# Altium PCB PCB_MAIN_FET.PcbDoc
Units mil, origin at the board's own origin, x right, y up, seen from the top; angles counter-clockwise.
Board outline 6000 x 4000 mil, 2 copper layers (Top Layer, Bottom Layer); 157 components, 92 nets, 451 pads, 0 vias.
Unrouted connection lines stored in the file: 311.
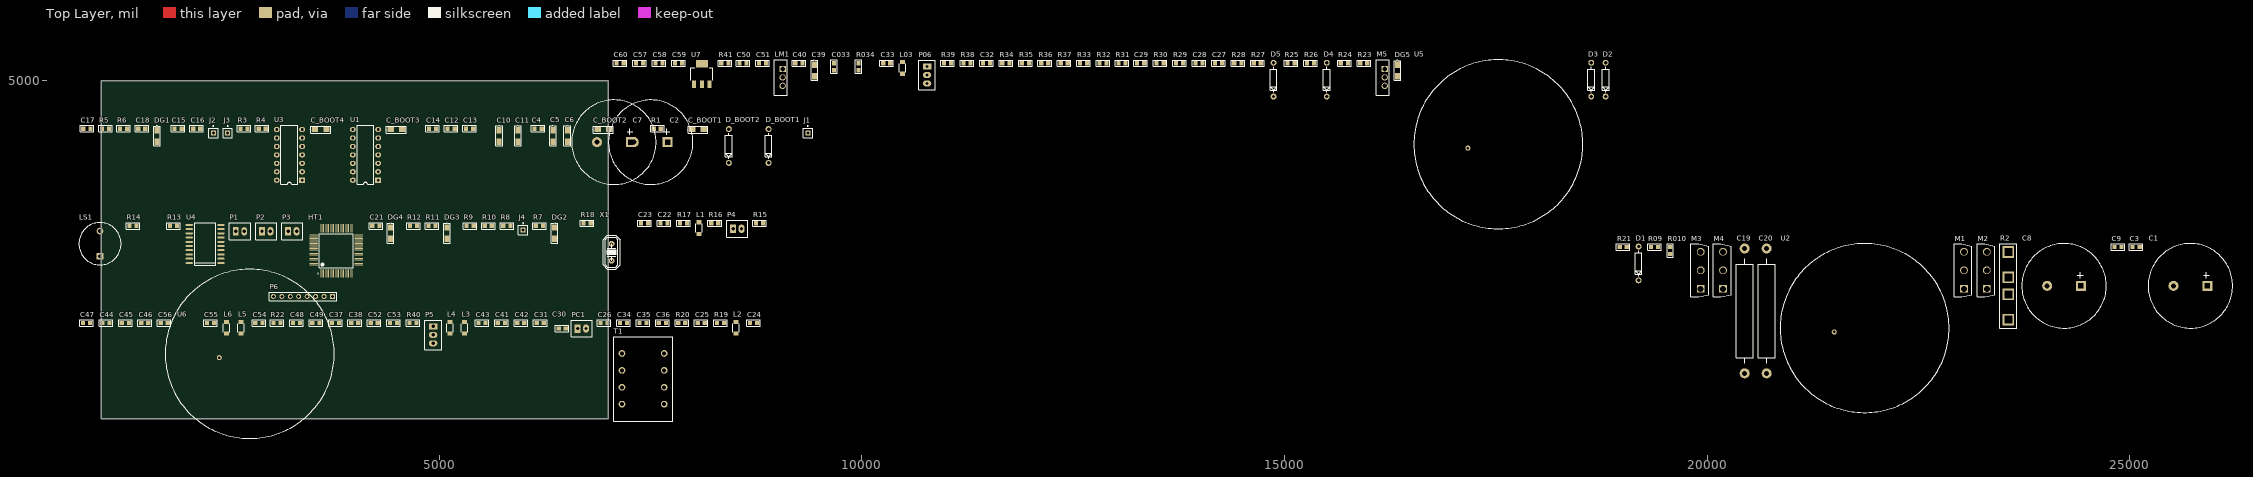
[diagram p0: Top Layer view]
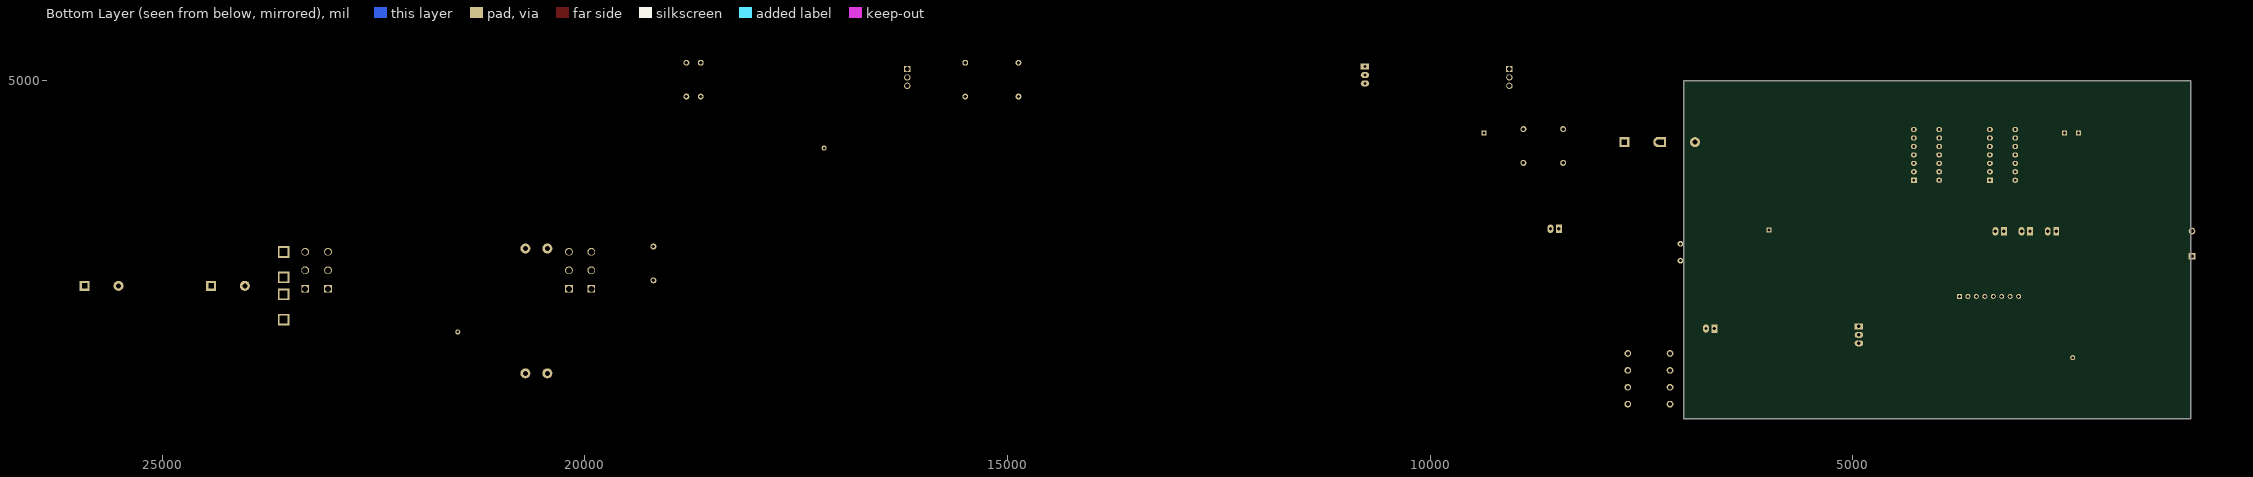
[diagram p1: Bottom Layer view, seen from below]

## Layer stack, top to bottom
Top Layer: signal copper 1.4
Dielectric: dielectric 12.6, FR-4, Dk 4.8
Bottom Layer: signal copper 1.4

## Board outline
1000,1000 7000,1000 7000,5000 1000,5000

## Design rules (kind name [scope] priority, off if disabled: settings)
Clearance [All] p1: gap=10
PolygonConnect [All] p1: connectstyle=Relief reliefconductorwidth=10 reliefentries=4 polygonreliefangle="90 Angle"
RoomDefinition overview [InComponentClass('overview')] p1: confinementstyle=ConfineIn formatcopy=TRUE lockcomponents=FALSE outline 7045,965 7770,965 7770,2085 7045,2085
RoutingVias [All] p1: holewidth=28 width=50 viastyle="Through Hole" minholewidth=28 minwidth=50 maxholewidth=28 maxwidth=50
SilkscreenOverComponentPads [All] p1: minsilkscreentomaskgap=10
SolderMaskExpansion [All] p1: expansion=4
Width [All] p1: maxlimit=10 minlimit=10 preferedwidth=10
27 further rules are at their usual default settings.

## Components (designator, comment, footprint, x,y, rotation, side; value= is the part's Value field where it differs from the comment)
C1 "3300uF-100V" 3300uF 25520,2575 r0 top
C2 "3300uF-100V" 3300uF 7300,4275 r0 top
C3 "CX4" C0805 24580,2875 r0 top
C4 "cap SMD" C0805 5670,4275 r0 top
C5 "10uF" CAP_10uF_SMD 5930,4210 r0 top
C6 "10uF" CAP_10uF_SMD 6100,4210 r0 top
C7 "3300uF-100V" 3300uF 6865,4275 r0 top
C8 "3300uF-100V" 3300uF 24025,2575 r0 top
C9 "cap SMD" C0805 24365,2875 r0 top
C10 "10uF" CAP_10uF_SMD 5295,4210 r0 top
C11 "10uF" CAP_10uF_SMD 5515,4210 r0 top
C12 "cap SMD" C0805 4640,4275 r0 top
C13 "cap SMD" C0805 4860,4275 r0 top
C14 "CX4" C0805 4420,4275 r0 top
C15 "CX4" C0805 1410,4275 r0 top
C16 "CX4" C0805 1630,4275 r0 top
C17 "CAP SMD1206" C0805 330,4275 r0 top
C18 "CAP SMD1206" C0805 980,4275 r0 top
C19 "polypropylen" 2.2UF-1000V 20445,1540 r90 top
C20 "polypropylen" 2.2UF-1000V 20705,1540 r90 top
C21 "cap SMD" C0805 3750,3125 r0 top
C22 "CX4" C0805 7160,3155 r0 top
C23 "CAP SMD1206" C0805 6930,3155 r0 top
C24 "CX4" C0805 8220,1975 r0 top
C25 "CX4" C0805 7600,1975 r0 top
C26 "CX4" C0805 6450,1975 r0 top
C27 "CX4" C0805 13720,5050 r0 top
C28 "CX4" C0805 13490,5050 r0 top
C29 "CX4" C0805 12800,5050 r0 top
C30 "CX4" C0805 5955,1910 r0 top
C31 "CX4" C0805 5695,1975 r0 top
C32 "CX4" C0805 10975,5050 r0 top
C33 "CX4" C0805 9795,5050 r0 top
C033 "CX4" C0805 9830,4670 r90 top
C34 "CX4" C0805 6680,1975 r0 top
C35 "CX4" C0805 6910,1975 r0 top
C36 "CX4" C0805 7140,1975 r0 top
C37 "CX4" C0805 3270,1975 r0 top
C38 "CAP SMD1206" C0805 3500,1975 r0 top
C39 "10uF" CAP_10uF_SMD 9025,4985 r0 top
C40 "CX4" C0805 8755,5050 r0 top
C41 "CX4" C0805 5235,1975 r0 top
C42 "CX4" C0805 5465,1975 r0 top
C43 "CX4" C0805 5005,1975 r0 top
C44 "CX4" C0805 555,1975 r0 top
C45 "CAP SMD1206" C0805 785,1975 r0 top
C46 "CAP SMD1206" C0805 1015,1975 r0 top
C47 "CX4" C0805 325,1975 r0 top
C48 "CX3" C0805 2810,1975 r0 top
C49 "CX4" C0805 3040,1975 r0 top
C50 "CX3" C0805 8095,5050 r0 top
C51 "CX4" C0805 8325,5050 r0 top
C52 "CX3" C0805 3730,1975 r0 top
C53 "CX4" C0805 3960,1975 r0 top
C54 "CX4" C0805 2365,1975 r0 top
C55 "CX4" C0805 1795,1975 r0 top
C56 "CX4" C0805 1245,1975 r0 top
C57 "CAP SMD1206" C0805 6870,5050 r0 top
C58 "CAP SMD1206" C0805 7100,5050 r0 top
C59 "CAP SMD1206" C0805 7330,5050 r0 top
C60 "CX4" C0805 6640,5050 r0 top
C_BOOT1 "10u" CAP_10uF_SMD 8200,4010 r90 top
C_BOOT2 "10uF" CAP_10uF_SMD 7080,4010 r90 top
C_BOOT3 "10uF" CAP_10uF_SMD 4630,4010 r90 top
C_BOOT4 "10u" CAP_10uF_SMD 3735,4010 r90 top
D1 "FR107" DIODE5819_V1 18775,2770 r0 top
D2 "FR107" DIODE5819_V1 18385,4945 r0 top
D3 "1N5819" DIODE5819_V1 18215,4945 r0 top
D4 "1N5819" DIODE5819_V1 15085,4945 r0 top
D5 "1N5819" DIODE5819_V1 14455,4945 r0 top
D_BOOT1 "UF4007" DIODE5819_V1 8480,4160 r0 top
D_BOOT2 "UF4007" DIODE5819_V1 8010,4160 r0 top
DG1 "4148" 4148_SMD 1870,3940 r90 top
DG2 "4148" 4148_SMD 6575,2790 r90 top
DG3 "4148" 4148_SMD 5305,2790 r90 top
DG4 "4148" 4148_SMD 4635,2790 r90 top
DG5 "4148" 4148_SMD 16550,4715 r90 top
HT1 "LPC175x" "PCBComponent_1 - duplicate" 3710,4255 r0 top
J1 "Socket" PIN1 9360,4385 r0 top
J2 "J1" PIN1 2325,4385 r0 top
J3 "J1" PIN1 2495,4385 r0 top
J4 "J1" PIN1 5990,3235 r0 top
L1 "Inductor" L_1uH 8240,2735 r90 top
L2 "Inductor" L_1uH 8680,1555 r90 top
L03 "Inductor" L_1uH 10650,4630 r90 top
L3 "Inductor" L_1uH 5465,1555 r90 top
L4 "Inductor" L_1uH 5295,1555 r90 top
L5 "Inductor" L_1uH 2820,1555 r90 top
L6 "Inductor" L_1uH 2650,1555 r90 top
LM1 "7812" TO220AB 8650,4865 r0 top
LS1 "SPEAKER" BUZZ 480,2905 r0 top
M1 "IRFP4468PBF-ND" TO247AB 23040,2540 r90 top
M2 "IRFP4468PBF-ND" TO247AB 23310,2540 r90 top
M3 "IRFP4468PBF-ND" TO247AB 19925,2540 r90 top
M4 "IRFP4468PBF-ND" TO247AB 20190,2540 r90 top
M5 "IRF640" TO220AB 15775,4865 r0 top
P1 "Header 2" CONECTOR_2PIN 2230,3285 r0 top
P2 "Header 2" CONECTOR_2PIN 2540,3285 r0 top
P3 "Header 2" CONECTOR_2PIN 2850,3285 r0 top
P4 "Header 2" CONECTOR_2PIN 8115,3315 r0 top
P5 "Header 3" CONECTOR_3PIN 4575,1935 r0 top
P06 "LM35 -Temperature Sensors" CONECTOR_3PIN 10420,5010 r0 top
P6 "Header 8" HDR1X8 3735,2450 r180 top
PC1 "JUMPER" CONECTOR_2PIN 6275,2135 r0 top
R1 "Resistor SMD0805" R0805 7150,4215 r0 top
R2 "Shun" RES_SHUN 23565,2175 r90 top
R3 "Resistor SMD0805" R0805 2260,4215 r0 top
R4 "Resistor SMD0805" R0805 2475,4215 r0 top
R5 "Resistor SMD0805" R0805 620,4215 r0 top
R6 "Resistor SMD0805" R0805 835,4215 r0 top
R7 "Resistor SMD0805" R0805 5755,3065 r0 top
R8 "Resistor SMD0805" R0805 5370,3065 r0 top
R09 "Resistor SMD0805" R0805 18950,2815 r0 top
R9 "Resistor SMD0805" R0805 4935,3065 r0 top
R010 "Resistor SMD0805" R0805 19785,2565 r90 top
R10 "Resistor SMD0805" R0805 5150,3065 r0 top
R11 "Resistor SMD0805" R0805 4485,3065 r0 top
R12 "Resistor SMD0805" R0805 4265,3065 r0 top
R13 "Resistor SMD0805" R0805 1425,3065 r0 top
R14 "Resistor SMD0805" R0805 945,3065 r0 top
R15 "Resistor SMD0805" R0805 8360,3095 r0 top
R16 "Resistor SMD0805" R0805 7830,3095 r0 top
R17 "Resistor SMD0805" R0805 7460,3095 r0 top
R18 "Resistor SMD0805" R0805 6320,3095 r0 top
R19 "Resistor SMD0805" R0805 7900,1915 r0 top
R20 "Resistor SMD0805" R0805 7440,1915 r0 top
R21 "Resistor SMD0805" R0805 18580,2815 r0 top
R22 "Resistor SMD0805" R0805 2650,1915 r0 top
R23 "Resistor SMD0805" R0805 15510,4990 r0 top
R24 "Resistor SMD0805" R0805 15280,4990 r0 top
R25 "Resistor SMD0805" R0805 14650,4990 r0 top
R26 "Resistor SMD0805" R0805 14880,4990 r0 top
R27 "Resistor SMD0805" R0805 14250,4990 r0 top
R28 "Resistor SMD0805" R0805 14020,4990 r0 top
R29 "Resistor SMD0805" R0805 13330,4990 r0 top
R30 "Resistor SMD0805" R0805 13100,4990 r0 top
R31 "Resistor SMD0805" R0805 12650,4990 r0 top
R32 "Resistor SMD0805" R0805 12425,4990 r0 top
R33 "Resistor SMD0805" R0805 12195,4990 r0 top
R34 "Resistor SMD0805" R0805 11275,4990 r0 top
R034 "Resistor SMD0805" R0805 10180,4740 r90 top
R35 "Resistor SMD0805" R0805 11505,4990 r0 top
R36 "Resistor SMD0805" R0805 11735,4990 r0 top
R37 "Resistor SMD0805" R0805 11965,4990 r0 top
R38 "Resistor SMD0805" R0805 10815,4990 r0 top
R39 "Resistor SMD0805" R0805 10585,4990 r0 top
R40 "120" R0805 4260,1915 r0 top
R41 "Resistor SMD0805" R0805 7950,4990 r0 top
T1 "EE25" TRANSFORMER 7660,1175 r90 top
U1 "IR2110" 74HC14 4240,3485 r90 top
U2 "LM358" PCBComponent_1 20740,2065 r0 top
U3 "IR2110" 74HC14 3340,3485 r90 top
U4 "74HCT245" 74HCT245D_STO163 1945,3020 r0 top
U5 "KA3842" PCBComponent_1 16405,4240 r0 top
U6 "SN75176A" PCBComponent_1 1630,1760 r0 top
U7 "LM1117S33" LM1117 7710,4835 r0 top
X1 "12MHZ" CRYSTAL_12Mhz 7190,2550 r90 top

## Footprints (in the part's own frame and the unit in brackets; to place one, negate y for a bottom-side part, rotate by r counter-clockwise, add the part's x,y. Pads: shape width x height; smd on the part's side, far side on the other; paste and mask are expansions set on the pad)
2.2UF-1000V [mm]
  round 3 hole 1.5: 1(0,0) 2(37.5,0)
  silkscreen extent 3,-2.54 34.5,2.54
74HC14 [mil]
  rect 60x70 hole 32: 1(340,-35)
  oval 60x70 hole 32: 2(440,-35) 3(540,-35) 4(640,-35) 5(740,-35) 6(840,-35) 7(940,-35) 8(940,265) 9(840,265) 10(740,265) 11(640,265) 12(540,265) 13(440,265) 14(340,265)
  silkscreen extent 290,15 990,215
74HCT245D_STO163 [mil]
  rect 86x24 smd: 1(469.6,-173.33)
  oval 86x24 smd: 2(469.6,-123.33) 3(469.6,-73.33) 4(469.6,-23.33) 5(469.6,26.67) 6(469.6,76.67) 7(469.6,126.67) 8(469.6,176.67) 9(469.6,226.67) 10(469.6,276.67) 11(94.6,276.67) 12(94.6,226.67) 13(94.6,176.67) 14(94.6,126.67) 15(94.6,76.67) 16(94.6,26.67) 17(94.6,-23.33) 18(94.6,-73.33) 19(94.6,-123.33) 20(94.6,-173.33)
  silkscreen extent 157,-198 407,302
3300uF [mm]
  round 3 hole 1.5: 1(0,0)
  rect 3x3 hole 1.5 square: 2(10.16,0)
  silkscreen extent -7.62,-12.7 17.78,12.7
4148_SMD [mil]
  rect 75.2x59.03 smd: 1(340.33,213.33) 2(476.33,213.33)
  silkscreen extent 291,174 533,253
BUZZ [mil]
  rect 78.73x78.73 hole 43.3: 1(503.37,18.3)
  round 78.73 hole 43.3: 2(503.37,318.3)
  silkscreen extent 253,-82 753,418
C0805 [mil]
  rect 50x50 smd: 1(456,160) 2(540,160)
  silkscreen extent 418,122 578,198
CAP_10uF_SMD [mil]
  rect 59.03x75.2 smd: 1(412.8,71.7) 2(412.8,207.7)
  silkscreen extent 373,22 452,265
CONECTOR_2PIN [mil]
  rect 70x100 hole 40: 1(360,-65)
  oval 70x100 hole 40: 2(460,-65)
  silkscreen extent 285,-165 535,35
CONECTOR_3PIN [mil]
  rect 100x70 hole 40: 1(350,160)
  oval 100x70 hole 40: 2(350,60) 3(350,-40)
  silkscreen extent 250,-115 450,235
CRYSTAL_12Mhz [mil]
  round 70 / inner round 60 / far side round 70 hole 35 mask+8: 1(322.79,153.14) 2(522.79,153.14)
  silkscreen extent 223,53 623,253
DIODE5819_V1 [mil]
  round 70 hole 40: 1(415,-130) 2(415,270)
  silkscreen extent 375,-80 455,220
HDR1X8 [mm] "Connector; Header; 8 Position"
  rect 1.5x1.5 hole 0.9: 1(0,0)
  round 1.5 hole 0.9: 2(2.54,0) 3(5.08,0) 4(7.62,0) 5(10.16,0) 6(12.7,0) 7(15.24,0) 8(17.78,0)
  silkscreen extent -1.27,-1.27 19.05,1.27
L_1uH [mil]
  rect 50x60 smd: 1(455,170) 2(592.8,170)
  silkscreen extent 472,130 572,209
LM1117 [mil]
  rect 48x88 smd: 1(305,125) 2(395,125) 3(485,125)
  rect 142x88 smd: 4(395,369)
  silkscreen extent 263,174 527,320
PCBComponent_1 [mil]
  round 60 hole 30: 0(765,-35)
  silkscreen extent 125,-990 2125,1010
"PCBComponent_1 - duplicate" [mil]
  oval 10x100.39 smd: 1(-120.01,-1533.73) 2(-100.32,-1533.73) 3(-80.64,-1533.73) 4(-60.95,-1533.73) 5(-41.27,-1533.73) 6(-21.58,-1533.73) 7(-1.9,-1533.73) 8(17.79,-1533.73) 9(37.47,-1533.73) 10(57.16,-1533.73) 11(76.84,-1533.73) 12(96.53,-1533.73) 13(116.21,-1533.73) 14(135.9,-1533.73) 15(155.58,-1533.73) 16(175.27,-1533.73) 17(194.95,-1533.73) 18(214.64,-1533.73) 19(234.32,-1533.73) 20(254.01,-1533.73) 41(254.01,-1000.27) 42(234.32,-1000.27) 43(214.64,-1000.27) 44(194.95,-1000.27) 45(175.27,-1000.27) 46(155.58,-1000.27) 47(135.9,-1000.27) 48(116.21,-1000.27) 49(96.53,-1000.27) 50(76.84,-1000.27) 51(57.16,-1000.27) 52(37.47,-1000.27) 53(17.79,-1000.27) 54(-1.9,-1000.27) 55(-21.58,-1000.27) 56(-41.27,-1000.27) 57(-60.95,-1000.27) 58(-80.64,-1000.27) 59(-100.32,-1000.27) 60(-120.01,-1000.27)
  oval 100.39x10 smd: 21(333.73,-1454.01) 22(333.73,-1434.32) 23(333.73,-1414.64) 24(333.73,-1394.95) 25(333.73,-1375.27) 26(333.73,-1355.58) 27(333.73,-1335.9) 28(333.73,-1316.21) 29(333.73,-1296.53) 30(333.73,-1276.84) 31(333.73,-1257.16) 32(333.73,-1237.47) 33(333.73,-1217.79) 34(333.73,-1198.1) 35(333.73,-1178.42) 36(333.73,-1158.73) 37(333.73,-1139.05) 38(333.73,-1119.36) 39(333.73,-1099.68) 40(333.73,-1079.99) 61(-199.73,-1079.99) 62(-199.73,-1099.68) 63(-199.73,-1119.36) 64(-199.73,-1139.05) 65(-199.73,-1158.73) 66(-199.73,-1178.42) 67(-199.73,-1198.1) 68(-199.73,-1217.79) 69(-199.73,-1237.47) 70(-199.73,-1257.16) 71(-199.73,-1276.84) 72(-199.73,-1296.53) 73(-199.73,-1316.21) 74(-199.73,-1335.9) 75(-199.73,-1355.58) 76(-199.73,-1375.27) 77(-199.73,-1394.95) 78(-199.73,-1414.64) 79(-199.73,-1434.32) 80(-199.73,-1454.01)
  silkscreen extent -152,-1539 268,-1066, body extent -150,-1484 284,-1050, height 59
PIN1 [mm] "Connector; Plug"
  rect 1.5x1.5 hole 0.9: 1(0,0)
  silkscreen extent -1.4,-1.4 1.4,2.17
R0805 [mil]
  rect 50x50 smd: 1(386,220) 2(470,220)
  silkscreen extent 348,182 508,258
RES_SHUN [mm]
  rect 3.5x3.5 hole 2.26 square: 1(0,0) 2(7.62,0) 3(12.7,0) 4(20.32,0)
  silkscreen extent -2.54,-2.54 22.86,2.54
TO220AB [mil]
  rect 75x75 hole 54: 1(411.27,276.17)
  round 75 hole 54: 2(411.27,176.17) 3(411.27,76.17)
  silkscreen extent 311,-35 465,385
TO247AB [mil]
  rect 92x92 hole 71: 1(0,0)
  round 92 hole 71: 2(219,0) 3(438,0)
  silkscreen extent -94,-95 532,115
TRANSFORMER [mm]
  round 2 hole 1.2: 1(0,0) 2(5.08,0) 3(10.16,0) 4(15.24,0) 5(15.24,12.7) 6(10.16,12.7) 7(5.08,12.7) 8(0,12.7)
  silkscreen extent -5.08,-2.54 20.32,15.24

## Part data
C1 C2 C5 C6 C7 C8 C10 C11: library part CAP
C3 C4 C9 C12 C13 C14 C15 C16 C21 C22 C24 C25 C26 C27 C28 C29 C30 C31 C32 C33 C033 C34 C35 C36 C37 C40 C41 C42 C43 C44 C47 C48 C49 C50 C51 C52 C53 C54 C55 C56 C60: library part Cap, "Capacitor Type 0805 SMD"
C17 C18 C23 C38 C45 C46 C57 C58 C59: library part Cap2, "Capacitor"
C19 C20: library part "Cap Semi", "Capacitor polypropylen"
C39: library part C
C_BOOT1 C_BOOT2 C_BOOT3 C_BOOT4: library part C_Dup1
D1 D2 D3 D4 D5: library part 1N4148
D_BOOT1 D_BOOT2 DG1 DG2 DG4: library part DIODE
DG3 DG5: library part DIODE_0
J2 J3 J4: library part Socket, "Socket"
L1 L2 L03 L3 L4 L5 L6: "Inductor Type 1206 SMD"
LM1: library part Component_1
M1 M2 M3 M4 M5: library part IRF540_Dup1
P1 P2 P3 P4: "Header, 2-Pin"
P5: "Header, 3-Pin"
P06: library part "Header 3", "Header, 3-Pin"
P6: "Header, 8-Pin"
PC1: library part "Header 2", "Header, 2-Pin"
R1 R3 R4 R5 R6 R7 R8 R09 R9 R010 R10 R11 R12 R13 R14 R15 R16 R17 R18 R19 R20 R21 R22 R23 R24 R25 R26 R27 R28 R29 R30 R31 R32 R33 R34 R034 R35 R36 R37 R38 R39 R41: library part Res1
R40: library part R
T1: library part TRAN_FBP1S4/SM_5
U1: library part IR2110_2
U2: library part LM2904/ON
U5: library part KA3842_1
U6: library part SN75176A_0
U7: library part LM117_0
X1: library part QZS10MEG_0, "Thach anh 12MHZ"

## Nets (pads, with @x,y where several pads share a name; then routed paths per layer and width w, separated by ;. In a path a pad name is that pad's centre, name@x,y a point inside that pad or via, vN(x,y) a via of type N, cw(c..) or ccw(c..) an arc to the next point about the centre after c; other vN are vias at no path point)
3V3: C3.2 C33.2 C34.2 C35.2 C36.2 C39.1 C40.2 C52.2 C53.2 C59.1 C60.2 HT1.21 HT1.42 HT1.56 HT1.77 L3.2 L4.2 P6.8 R010.1 R21.2 R41.2 U7.2 U7.4
5V: C15.2 C16.2 C17.1 C18.1 C21.2 C37.1 C38.1 C56.2 C57.1 C58.1 D4.2 P06.3 R13.2 R23.2 R32.2 U1.9 U3.9 U4.20 U7.3
48VDC: C1.1 C2.1 C7.1 C8.1 C19.1 C20.1 C22.1 D1.1 J1.1 M1.2 M2.2 R18.1 R19.1 R20.1 R30.2 T1.1
AD2: C27.2 HT1.7 R28.1
AD3: C32.2 HT1.6 R33.1
AD4: C033.2 HT1.18 R034.1
AD5: HT1.17
BATTERY_LOW: HT1.62 U4.8
BUZZ: HT1.58 U4.6
COM_S: C4.1 C5.2 C6.2 C9.1 C10.2 C11.2 C19.2 C20.2 C44.2 C45.2 C46.2 C47.2 LM1.2 M3.3 M4.3 R2.3 R11.2 R12.2 T1.7 U1.2 U3.2
DTR1: HT1.54
EINT0: HT1.41 R21.1
EN_INVERTER: HT1.61 P4.2 R23.1
ERROR: HT1.45
GND: C1.2 C2.2 C3.1 C7.2 C8.2 C14.1 C15.1 C16.1 C17.2 C18.2 C21.1 C23.2 C24.2 C25.2 C26.2 C27.1 C28.1 C29.1 C30.1 C32.1 C033.1 C33.1 C34.1 C35.1 C36.1 C37.2 C38.2 C39.2 C40.1 C41.1 C42.1 C43.2 C52.1 C53.1 C54.1 C55.1 C56.1 C57.2 C58.2 C59.2 C60.1 HT1.24 HT1.33 HT1.43 HT1.57 HT1.66 HT1.78 J4.1 L5.2 L6.2 P1.1 P2.1 P3.1 P4.1 P5.2 P06.2 P6.7 R2.1 R2.2 R8.2 R09.2 R25.1 R34.2 R35.2 R36.2 R37.2 R38.1 R39.1 T1.4 T1.5 U1.13 U3.13 U4.10 U4.19 U7.1
I_IN_SEN: L1.1 R7.2
LED_ATTERY_LOW: P2.2 U4.12
LED_OK: P1.2
LED_VERLOAD: P3.2 U4.11
M+: C13.1 C_BOOT3.2 J3.1 M2.3 M4.2 R6.2 U1.5
M-: C12.1 C_BOOT4.2 J2.1 M1.3 M3.2 R5.2 U3.5
NET_G1: DG2.1 M1.1 R3.1 R5.1
NET_G2: DG2.2 R3.2 U3.7
NET_G3: DG4.2 R9.2 U3.1
NET_G5: DG4.1 M3.1 R9.1 R11.1
NET_G6: DG3.1 M4.1 R10.2 R12.1
NET_G8: DG1.1 M2.1 R4.2 R6.1
NET_G9: DG3.2 R10.1 U1.1
NET_G10: DG1.2 R4.1 U1.7
NetC12_2: C12.2 C_BOOT1.1 D_BOOT1.2 U3.6
NetC13_2: C13.2 C_BOOT2.1 D_BOOT2.2 U1.6
NetC14_2: C14.2 R1.1
NetC22_2: C22.2 D2.2 R18.2 R19.2 R20.2
NetC24_1: C24.1 C25.1 R26.2
NetC26_1: C26.1 R26.1
NetC28_2: C28.2 HT1.19 X1.1
NetC29_2: C29.2 HT1.20 X1.2
NetC30_2: C30.2 R31.1
NetC31_1: C31.1 R29.2
NetC31_2: C31.2 R29.1 R32.1 R38.2
NetC41_2: C41.2 C42.2 HT1.34 HT1.67
NetC43_1: C43.1 P5.3 PC1.2
NetC46_1: C46.1 C47.1 D3.2 LM1.1
NetC48_1: C48.1 C49.1 HT1.9 L6.1
NetC48_2: C48.2 C49.2 HT1.8 L3.1
NetC50_1: C50.1 C51.1 HT1.12 L5.1
NetC50_2: C50.2 C51.2 HT1.10 L4.1
NetC54_2: C54.2 P5.1 R40.1
NetC_BOOT1_2: C_BOOT1.2 C_BOOT4.1
NetC_BOOT2_2: C_BOOT2.2 C_BOOT3.1
NetD1_2: D1.2 R14.1 R15.1 R16.1 R17.1
NetD2_1: D2.1 M5.2 T1.2
NetD3_1: D3.1 T1.8
NetD4_1: D4.1 T1.6
NetD5_1: D5.1 T1.3
NetDG5_1: DG5.1 R22.2
NetDG5_2: DG5.2 R24.2
NetL1_2: L1.2 R28.2
NetL2_2: L2.2 R33.2
NetL03_1: L03.1 P06.1
NetL03_2: L03.2 R034.2
NetLS1_1: LS1.1 U4.14
NetLS1_2: LS1.2 R13.1
NetM5_1: M5.1 R22.1 R24.1 R27.1
NetM5_3: M5.3 R27.2 R31.2 R34.1 R35.1 R36.1 R37.1
NetPC1_1: PC1.1 R40.2
NetR1_2: R1.2 R2.4
NetR7_1: R7.1 R8.1
NetR09_1: R09.1 R010.2
NRESET: C55.2 HT1.14 P6.3 R41.1
NTRST: HT1.4 P6.1
OFF_PWM: HT1.64 R25.2 U4.7
OFF_PWM_O: U1.11 U3.11 U4.13
OVERLOAD: HT1.63 U4.9
PWM1H: HT1.31 U4.2
PWM1H_O: U3.10 U4.18
PWM1L: HT1.32 U4.3
PWM1L_O: U3.12 U4.17
PWM2H: HT1.35 U4.4
PWM2H_O: U1.10 U4.16
PWM2L: HT1.36 U4.5
PWM2L_O: U1.12 U4.15
RXD1: HT1.59
TCK: HT1.5 P6.5
TDI: HT1.2
TDO: HT1.1 P6.4
TMS: HT1.3 P6.6
TXD1: HT1.60
V_DRIVE: C4.2 C5.1 C6.1 C9.2 C10.1 C11.1 C44.1 C45.1 D_BOOT1.1 D_BOOT2.1 LM1.3 U1.3 U3.3
V_IN_SEN: L2.1 R30.1 R39.2
VCC: U4.1
VDD_KA: C23.1 D5.2 R14.2 R15.2 R16.2 R17.2
pads on no net: HT1.11 HT1.13 HT1.15 HT1.16 HT1.22 HT1.23 HT1.25 HT1.26 HT1.27 HT1.28 HT1.29 HT1.30 HT1.37 HT1.38 HT1.39 HT1.40 HT1.44 HT1.46 HT1.47 HT1.48 HT1.49 HT1.50 HT1.51 HT1.52 HT1.53 HT1.55 HT1.65 HT1.68 HT1.69 HT1.70 HT1.71 HT1.72 HT1.73 HT1.74 HT1.75 HT1.76 HT1.79 HT1.80 P6.2 U1.4 U1.8 U1.14 U2.0 U3.4 U3.8 U3.14 U5.0 U6.0